# EAGLE board ir_remote_v4 (EAGLE 7.2.0)
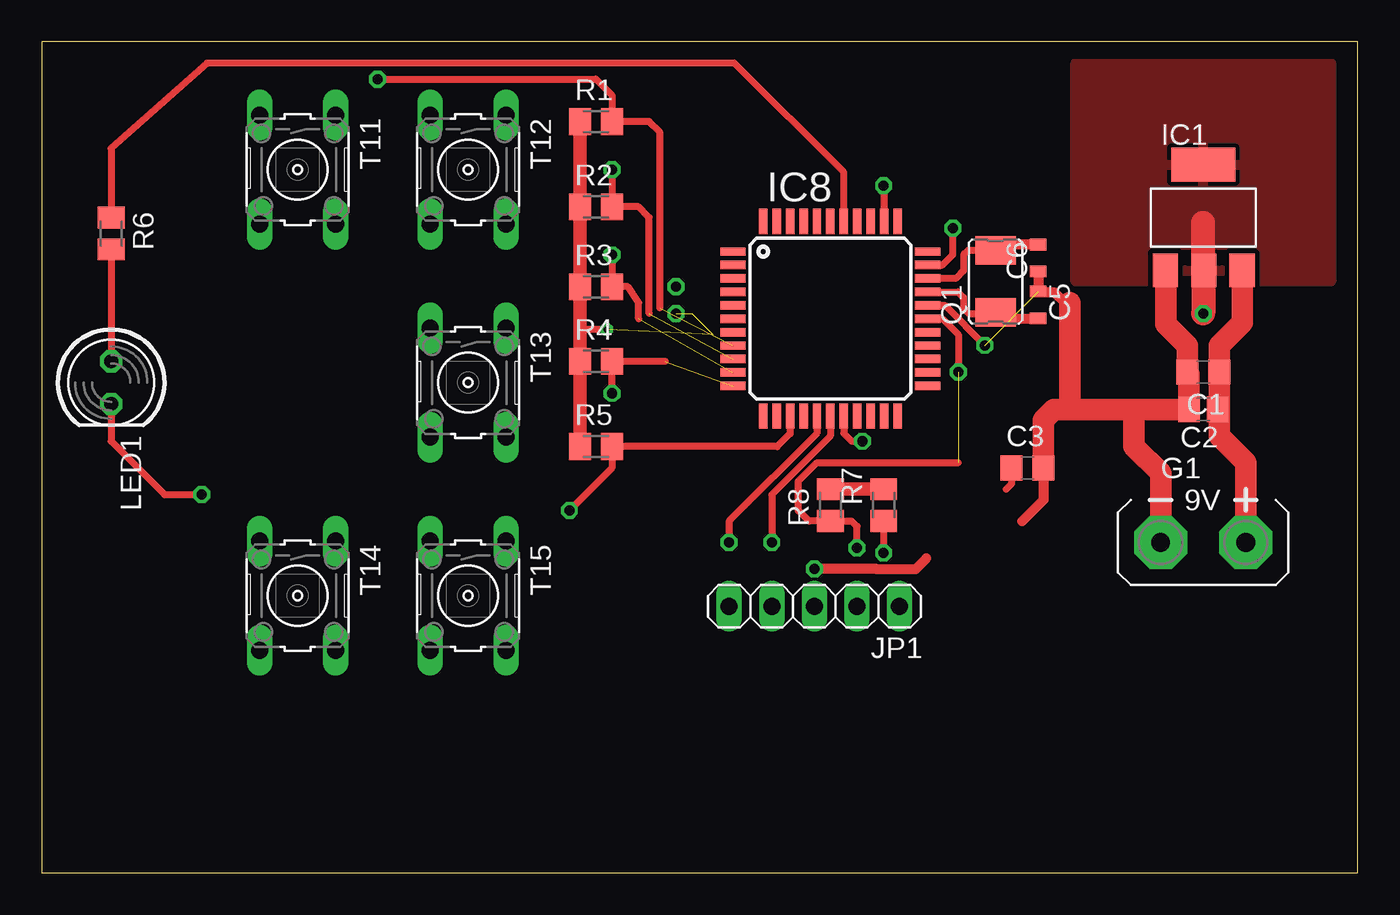
[diagram p0: board, top side]
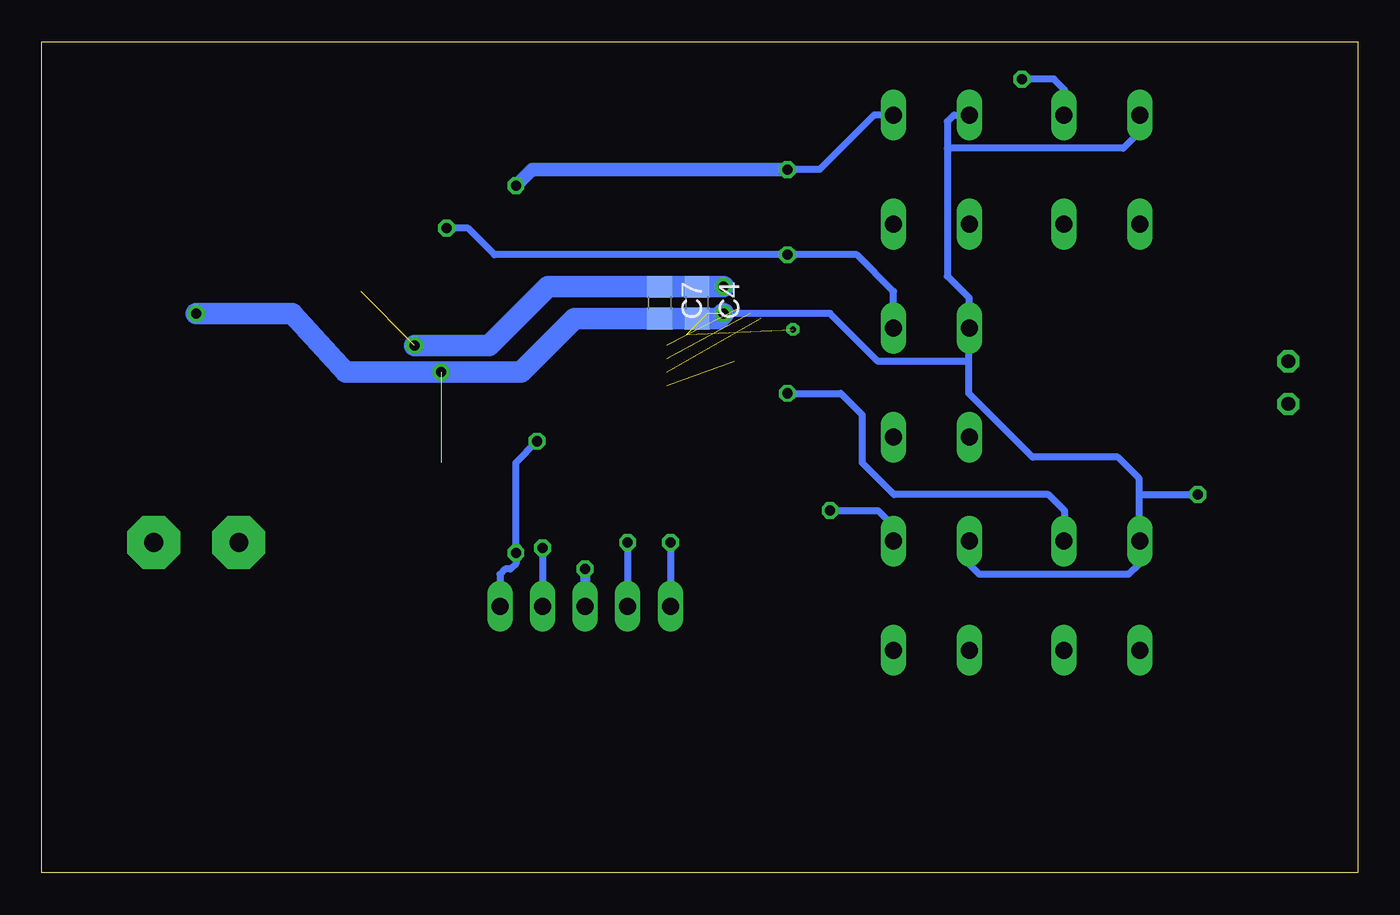
[diagram p1: board, bottom side, seen from below]

Size 78.41 x 49.52 mm. Coordinates in mm from the lower left corner, seen from the top.
Outline: 0,0 78.41,0 78.41,49.52 0,49.52 0,0
Copper layers (1*16): Top 0.035mm / dielectric 1.5mm / Bottom 0.035mm
Design rules "default": minimum track width 6mil, minimum drill 0.35mm, track to track 6mil, track to pad 6mil, pad to pad 6mil, via to via 6mil, smd to smd 6mil, copper to edge 40mil, drill to drill 6mil, minimum pad ring 10mil, minimum via ring 8mil, stop-mask expansion 4mil, vias tented up to drill 0mil, thermal gap 10mil

## Footprints (pad centres in the part's own frame; a part is rotated, then mirrored left to right if it is on the bottom)
C0805 = smd 1.3 x 1.5: 1 -0.95,0; 2 0.95,0
C0805' = smd 1.3 x 1.5: 1 -0.85,0; 2 0.85,0
C0603_WE = smd 0.7 x 1: 1 -0.8,0; 2 0.8,0
AB9V = drill 1.118 pad 3.15 octagon: + 0,2.54; - 0,-2.54
SOT223 = smd 1.499 x 2.007: 1 -2.261,-3.15; 2 0.025,-3.15; 3 2.311,-3.15 | smd 3.81 x 2.007: 4 0,3.15
TQFP44 = smd 1.5 x 0.5: 1 -5.8,4; 2 -5.8,3.2; 3 -5.8,2.4; 4 -5.8,1.6; 5 -5.8,0.8; 6 -5.8,0; 7 -5.8,-0.8; 8 -5.8,-1.6; 9 -5.8,-2.4; 10 -5.8,-3.2; 11 -5.8,-4; 23 5.8,-4; 24 5.8,-3.2; 25 5.8,-2.4; 26 5.8,-1.6; 27 5.8,-0.8; 28 5.8,0; 29 5.8,0.8; 30 5.8,1.6; 31 5.8,2.4; 32 5.8,3.2; 33 5.8,4 | smd 0.5 x 1.5: 12 -4,-5.8; 13 -3.2,-5.8; 14 -2.4,-5.8; 15 -1.6,-5.8; 16 -0.8,-5.8; 17 0,-5.8; 18 0.8,-5.8; 19 1.6,-5.8; 20 2.4,-5.8; 21 3.2,-5.8; 22 4,-5.8; 34 4,5.8; 35 3.2,5.8; 36 2.4,5.8; 37 1.6,5.8; 38 0.8,5.8; 39 0,5.8; 40 -0.8,5.8; 41 -1.6,5.8; 42 -2.4,5.8; 43 -3.2,5.8; 44 -4,5.8
1X05 = drill 1.016 long: 1 -5.08,0; 2 -2.54,0; 3 0,0; 4 2.54,0; 5 5.08,0
LED5MM = drill 0.813 octagon: A -1.27,0; K 1.27,0
QUARZ_HC5032/2 = smd 1.7 x 2.4: 1 -1.85,0; 2 1.85,0
M0805 = smd 1.3 x 1.6: 1 -0.95,0; 2 0.95,0
TASTER3301 = drill 1.016 long: 1 -3.251,2.261; 2 3.251,2.261; 3 -3.251,-2.261; 4 3.251,-2.261

## Placement (x,y rotation side)
C1  10u  [C0805]  69.22,29.84 180 top
C2  100n  [C0805']  69.22,27.62 180 top
C3  10u  [C0805]  58.74,24.13 0 top
C4  100n  [C0805]  39.37,33.97 270 bottom
C5  22p  [C0603_WE]  59.37,33.85 270 top
C6  22p  [C0603_WE]  59.37,36.64 90 top
C7  100n  [C0805]  41.59,33.97 270 bottom
G1  AB9V  [AB9V]  69.22,19.68 270 top
IC1  AP1117E50G  [SOT223]  69.22,39.05 0 top
IC8  [TQFP44]  46.99,33.02 0 top
JP1  [1X05]  46.04,15.88 180 top
LED1  [LED5MM]  4.13,29.21 270 top
Q1  10MHz  [QUARZ_HC5032/2]  56.83,35.24 90 top
R1  10k  [M0805]  33.02,44.77 0 top
R2  10k  [M0805]  33.02,39.69 0 top
R3  10k  [M0805]  33.02,34.92 0 top
R4  10k  [M0805]  33.02,30.48 0 top
R5  10k  [M0805]  33.02,25.4 0 top
R6  100  [M0805]  4.13,38.1 270 top
R7  470  [M0805]  50.16,21.91 90 top
R8  10k  [M0805]  46.99,21.91 90 top
T11  TASTER3301  [TASTER3301]  15.24,41.91 270 top
T12  TASTER3301  [TASTER3301]  25.4,41.91 270 top
T13  TASTER3301  [TASTER3301]  25.4,29.21 270 top
T14  TASTER3301  [TASTER3301]  15.24,16.51 270 top
T15  TASTER3301  [TASTER3301]  25.4,16.51 270 top

## Library data of the parts
C1 C3-C7 R1-R8 = rcl
C2 = rcl_416
G1 = battery
IC1 = Bernd_110428
IC8 Q1 T11-T15 = Bernd
JP1 = pinhead
LED1 = led

## Nets
+9V: C1.1 C2.1 G1.+
D0_LCD: IC8.27
D1_LCD: IC8.26
GND: LED1.K T11.3 T12.3 T13.3 T14.3 T15.3
MCLR: IC8.18 JP1.1 R7.1
N$19: LED1.A R6.2
N$24: R7.2 R8.2
N$47: C5.2 IC8.30 Q1.1
N$48: C6.2 IC8.31 Q1.2
RB0: IC8.8 R1.2 T11.1
RB1: IC8.9 IC8.35 R2.2 T12.1
RB2: IC8.10 IC8.32 R3.2 T13.1
RB3: IC8.11 R4.2 T14.1
RB4: IC8.14 R5.2 T15.1
RB5: IC8.15
RB6: IC8.16 JP1.5
RB7: IC8.17 JP1.4
RD0_LED: IC8.38 R6.1
RDS_INT: IC8.36
S$2: C3.1
S$3: IC1.3
S$4: JP1.3
S$5: C1.2 C2.2 C3.2 C5.1 C6.1 G1.- IC1.1 IC8.29
VCC: IC1.2 IC1.4 IC8.28 JP1.2 R1.1 R2.1 R3.1 R4.1 R5.1 R8.1

## Tracks (layer width: path | path; a pad name or v marks a point on that pad's centre or on a via)
+9V
  Top 1.27: C1.1 70.17,27.09 | 70.17,27.09 C2.1 | G1.+ 71.75,24.45 70.17,26.04 70.17,27.09
GND  (via drill 0.6)
  Top 0.406: LED1.K 4.13,25.72 7.3,22.54 v9.53,22.54
  Bottom 0.406: 13.02,22.54 v9.53,22.54 | 24.45,43.18 24.45,44.77 24.05,45.16 T12.3 | 24.45,43.18 24.45,35.56 23.14,34.25 T13.3 23.18,32.42 23.18,30.48 | 24.45,43.18 13.97,43.18 12.98,44.17 T11.3 | 13.02,19.8 13.02,22.54 | 13.02,19.8 T14.3 | 13.02,19.8 13.02,18.41 13.65,17.78 22.54,17.78 23.18,18.41 23.18,19.72 T15.3 | 13.02,22.54 13.02,23.5 14.29,24.77 19.37,24.77 23.18,28.57 23.18,30.48 | 23.18,30.48 28.57,30.48 31.43,33.34 37.47,33.34
MCLR  (via drill 0.6)
  Top 0.406: R7.1 v50.16,19.05 | IC8.18 47.79,26.19 48.26,25.72 v48.9,25.72
  Bottom 0.406: JP1.1 51.12,17.78 50.8,18.1 50.48,18.1 50.16,18.41 v50.16,19.05 50.16,24.45 v48.9,25.72
N$19
  Top 0.406: R6.2 LED1.A
N$24
  Top 0.813: R8.2 R7.2
N$47
  Top 0.406: Q1.1 56.78,33.34 55.24,33.34 54.93,33.66 54.93,34.29 54.6,34.62 IC8.30
  Top 0.61: Q1.1 57.41,33.39 57.78,33.02 59.35,33.02 C5.2
N$48
  Top 0.406: 56.78,37.15 Q1.2 55.19,37.09 54.93,36.83 54.93,35.88 54.47,35.42 IC8.31
  Top 0.61: Q1.2 57.41,37.09 57.78,37.47 59.35,37.47 C6.2
RB0  (via drill 0.6)  (1 unrouted)
  Top 0.406: 36.83,33.66 36.83,44.13 36.2,44.77 R1.2 33.97,46.35 33.02,47.31 v20,47.31
  Bottom 0.406: T11.1 17.46,45.2 17.46,46.67 18.1,47.31 v20,47.31
RB1  (via drill 0.6)  (1 unrouted)
  Top 0.406: 36.2,33.34 36.2,39.05 35.56,39.69 R2.2 v33.97,41.91 | v50.16,40.96 50.19,40.93 IC8.35
  Bottom 0.406: T12.1 28.82,45.16 32.07,41.91 v33.97,41.91
  Bottom 0.813: v33.97,41.91 49.21,41.91 v50.16,40.96
RB2  (via drill 0.6)  (1 unrouted)
  Top 0.406: 35.56,33.02 35.56,33.97 34.92,34.92 R3.2 v33.97,36.83 | IC8.32 53.68,36.22 54.29,36.83 v54.29,38.42
  Bottom 0.406: T13.1 27.66,34.65 29.84,36.83 v33.97,36.83 51.44,36.83 53.02,38.42 v54.29,38.42
RB3  (via drill 0.6)  (1 unrouted)
  Top 0.406: 37.15,30.48 R4.2 v33.97,28.58 v33.97,28.57
  Bottom 0.406: v33.97,28.57 30.8,28.57 29.53,27.3 29.53,24.45 27.62,22.54 18.41,22.54 17.46,21.59 17.46,19.8 T14.1
RB4  (via drill 0.6)
  Top 0.406: IC8.14 44.59,26.18 43.81,25.4 R5.2 33.97,24.15 33.98,24.13 v31.43,21.59
  Bottom 0.406: v31.43,21.59 28.57,21.59 27.62,20.64 27.62,19.8 T15.1
RB6  (via drill 0.6)
  Top 0.406: IC8.16 46.19,26.19 40.96,20.95 v40.96,19.68
  Bottom 0.406: v40.96,19.68 JP1.5
RB7  (via drill 0.6)
  Top 0.406: IC8.17 46.99,26.04 43.5,22.54 v43.5,19.68
  Bottom 0.406: v43.5,19.68 JP1.4
RD0_LED
  Top 0.406: IC8.38 47.79,41.74 41.27,48.26 9.84,48.26 4.13,43.18 R6.1
S$2
  Top 0.406: C3.1 57.79,23.18 57.47,22.86
S$3
  Top 1.27: IC1.3 71.53,32.79 70.17,31.43 70.17,29.53
S$4  (via drill 0.6)
  Top 0.61: 52.7,18.73 52.06,18.09 49.77,18.09 49.76,18.1 v46.04,18.1
  Bottom 0.61: v46.04,18.1 JP1.3
S$5  (via drill 0.6)  (1 unrouted)
  Top 0.406: IC8.29 53.81,33.82 v56.2,31.43
  Top 0.61: C6.1 C5.1 59.41,34.61 60.33,34.61 60.96,33.97 61.28,33.97 | C3.2 59.69,22.23 58.42,20.95
  Top 1.27: IC1.1 66.99,35.87 66.99,32.7 68.27,31.43 C1.2 68.36,29.75 C2.2 65.09,27.62 | G1.- 66.67,23.81 65.09,25.4 65.09,27.62 | 61.28,27.62 65.09,27.62 | 61.28,27.62 61.28,33.97 | 61.28,27.62 60.33,27.62 59.69,26.99 C3.2
  Bottom 1.27: v56.2,31.43 51.75,31.43 48.26,34.92 v37.78,34.92
VCC  (via drill 0.35, 0.6)  (4 unrouted)
  Top 0.406: IC8.28 53.66,33.02 54.61,32.07 v54.61,29.84 | v48.58,19.37 48.58,20.64 48.26,20.96 R8.1 45.72,20.96 45.09,21.59 45.09,23.34 46.19,24.45 54.61,24.45 | v33.66,32.38 32.07,32.38
  Top 0.813: R1.1 R2.1 R3.1 32.07,32.38 R4.1 R5.1
  Top 1.27: IC1.4 69.22,42.23
  Top 1.422: 69.22,35.9 IC1.2 69.22,35.93 | IC1.4 69.24,42.2 | 69.22,35.9 69.22,38.73 | 69.22,35.9 v69.22,33.34
  Bottom 0.406: v48.58,19.37 JP1.2
  Bottom 1.27: v69.22,33.34 63.5,33.34 60.33,29.84 v54.61,29.84 49.85,29.84 46.67,33.02 38.1,33.02 v37.78,33.34
  pour Top (isolate 0.305): 61.59,48.26 76.83,48.26 76.83,35.24 61.59,35.24